# Altium PCB P080514_V11.PcbDoc
Units mm, origin at the board's own origin, x right, y up, seen from the top; angles counter-clockwise.
Board outline 33 x 22 mm, 2 copper layers (Top Layer, Bottom Layer); 22 components, 16 nets, 64 pads, 4 vias.
Unrouted connection lines stored in the file: 1.
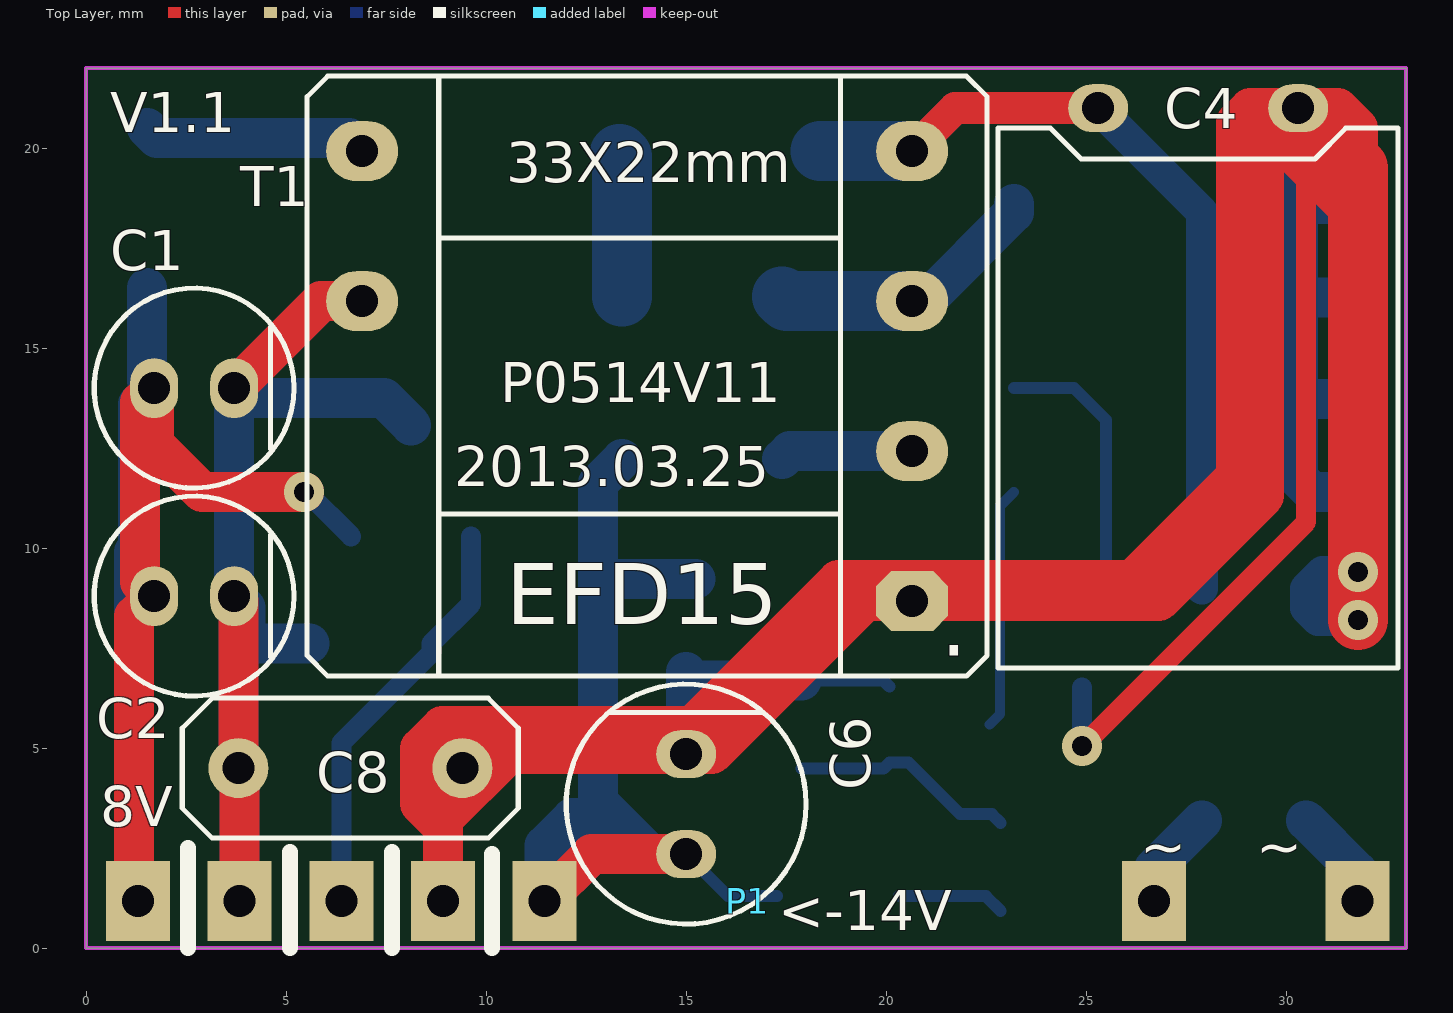
[diagram p0: Top Layer view]
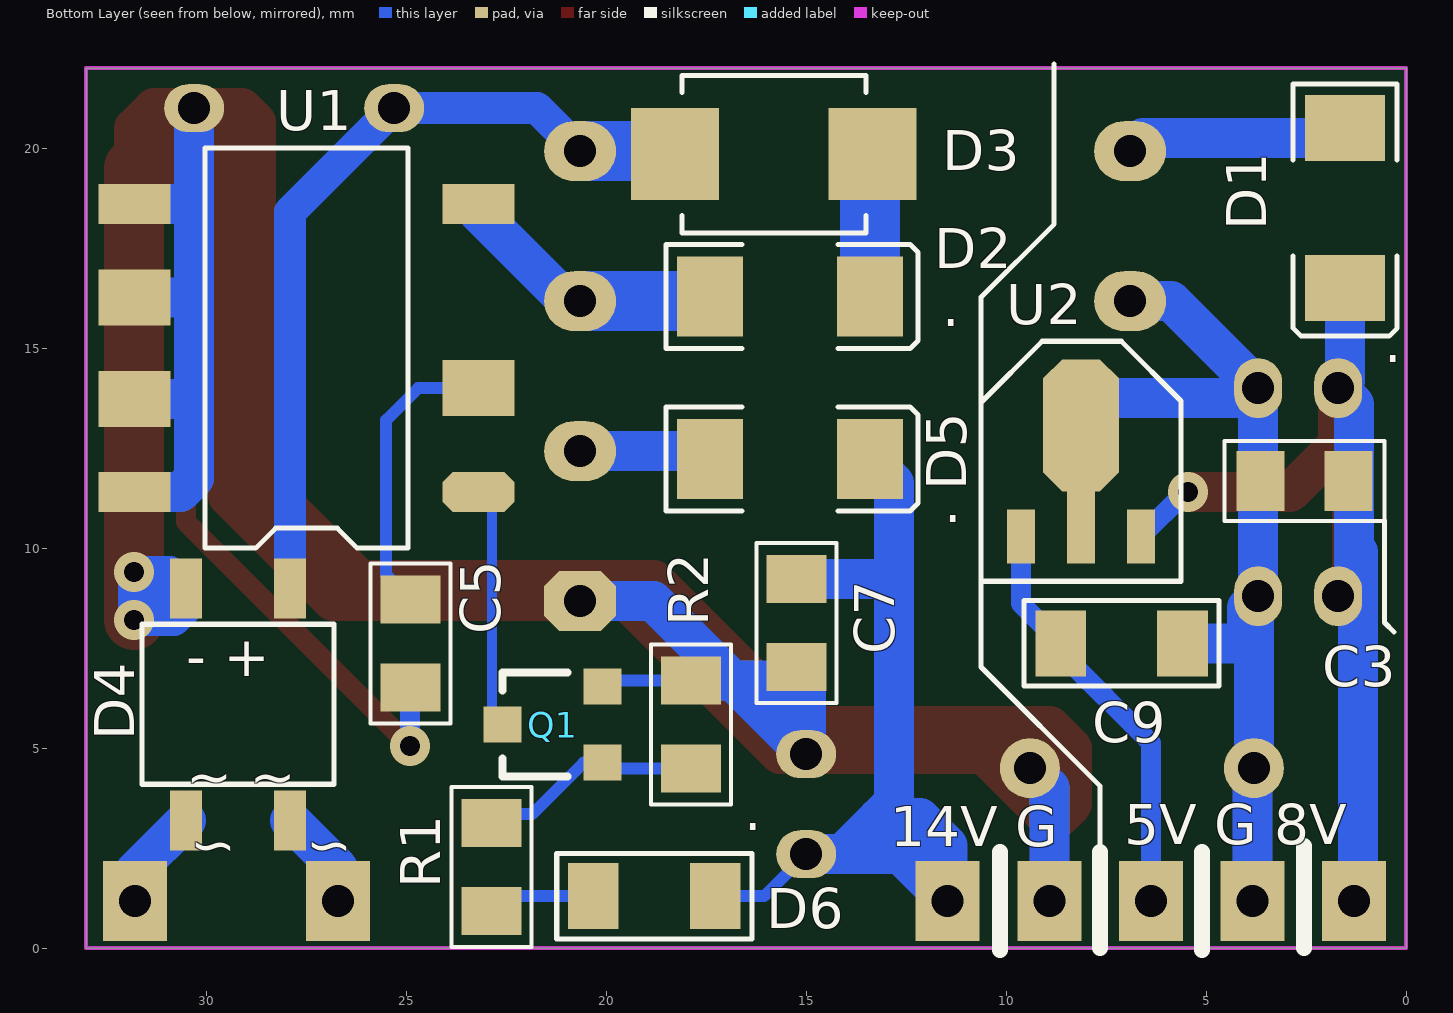
[diagram p1: Bottom Layer view, seen from below]

## Layer stack, top to bottom
Top Layer: signal copper 0.0356
Dielectric: dielectric 0.32, FR-4, Dk 4.8
Bottom Layer: signal copper 0.0356

## Board outline
0,0 33,0 33,22 0,22

## Design rules (kind name [scope] priority, off if disabled: settings)
Clearance [All] p1: gap=0.2
ComponentClearance [All] p1: gap=0 collisioncheckmode=3 verticalgap=0 showdistances=FALSE
Height [All] p1: minheight=0 maxheight=30 prefheight=12.7
HoleSize [All] p1: absolutevalues=TRUE maxlimit=10 minlimit=0.025 maxpercent=80.000 minpercent=20.000
HoleToHoleClearance [All] p1: gap=0.2 allowstackedmicrovias=TRUE
MinimumSolderMaskSliver [All] p1 off: minsoldermaskwidth=0.2
PolygonConnect [All] p1: connectstyle=Relief reliefconductorwidth=0.254 reliefentries=4 polygonreliefangle="90 Angle"
RoutingVias [All] p1: holewidth=0.8 width=1.27 viastyle="Through Hole" minholewidth=0.4 minwidth=0.8 maxholewidth=5 maxwidth=10
SilkToSilkClearance [All] p1 off: silktosilkclearance=0.254
SilkscreenOverComponentPads [All] p1 off: minsilkscreentomaskgap=0.254
SolderMaskExpansion [All] p1: expansion=0.102
TestPointUsage [All] p1: valid=0 allowmultiple=FALSE
Testpoint [All] p1: side=15 testpointundercomponent=TRUE minsize=1.016 maxsize=2.54 preferedsize=1.524 minholesize=0 maxholesize=1.016 preferedholesize=0.813 testpointgrid=0.025 style=1021 order=0123456789
Width [All] p1: maxlimit=10 minlimit=0.254 preferedwidth=0.254
17 further rules are at their usual default settings.

## Components (designator, comment, footprint, x,y, rotation, side; value= is the part's Value field where it differs from the comment)
C1 "Cap Pol1" C-5*7 2.7,14 r0 top
C2 "Cap Pol1" C-5*7 2.7,8.8 r0 top
C3 "Cap" 0805 2.54,11.684 r90 bottom
C4 "Cap Pol1" "C-10 卧式" 27.8,21 r0 top locked
C5 "Cap" 0805 24.892,7.62 r0 bottom
C6 "Cap Pol1" 电解电容6*11mm-脚距2.5mm 15,3.6 r90 top
C7 "Cap" 0805 15.24,8.128 r0 bottom
C8 "Y电容" 07D471K 6.604,4.5 r180 top
C9 "25V" 1206 7.112,7.62 r180 bottom
D1 "US1J" SMA 1.524,18.5 r270 bottom
D2 "US1J" SMA 15.399,16.292 r180 bottom
D3 "P6KE200" SMBJ 15.807,19.848 r180 bottom
D4 "Bridge1" MB10S 29.2,6.096 r180 bottom
D5 "US1J" SMA 15.399,12.228 r180 bottom
D6 "14V" 1206 18.796,1.3 r180 bottom
P1 "Header 13" 2.54引脚 1.3,1.172 r0 top locked
Q1 "" sot-23 21.336,5.588 r90 bottom
R1 "Res1" 0805 22.86,2.032 r0 bottom
R2 "Res1" 0805 17.884,5.588 r0 bottom
T1 "EFD15" EFD15_DIP8 13.775,14.3 r90 top locked
U1 "" TNY275_SMD 27.491,15 r0 bottom
U2 "78L05" SOT89 8.128,11.684 r180 bottom locked

## Footprints (in the part's own frame and the unit in brackets; to place one, negate y for a bottom-side part, rotate by r counter-clockwise, add the part's x,y. Pads: shape width x height; smd on the part's side, far side on the other; paste and mask are expansions set on the pad)
2.54引脚 [mm]
  rect 1.6x2 hole 0.8: 1(0,0) 2(2.54,0) 3(5.08,0) 4(7.62,0) 5(10.16,0) 11(25.4,0) 13(30.48,0)
07D471K [mm]
  round 1.5 hole 0.8: 1(-2.8,0) 2(2.8,0)
  silkscreen extent -4.2,-1.75 4.2,1.75
0805 [mm]
  rect 1.5x1.2 smd: 1(0,1.1) 2(0,-1.1)
  silkscreen extent -1,-2 1,2
1206 [mil]
  rect 50x65 smd: 1(-60,0) 2(60,0)
  silkscreen extent -96,-42 96,42
C-5*7 [mm]
  oval 1.2x1.5 hole 0.8: 1(-1,0) 2(1,0)
  silkscreen extent -2.5,-2.5 2.5,2.5
"C-10 卧式" [mm]
  oval 1.5x1.2 hole 0.8: 1(-2.5,0) 2(2.5,0)
  silkscreen extent -5,-14 5,-0.5
EFD15_DIP8 [mm]
  oct 1.5x1.8 hole 0.8: 1(-5.625,-6.875)
  oval 1.5x1.8 hole 0.8: 2(-1.875,-6.875) 3(1.875,-6.875) 4(5.625,-6.875) 5(5.625,6.875) 6(1.875,6.875)
  silkscreen extent -7.5,-8.75 7.5,8.25
MB10S [mm]
  rect 0.8x1.5 smd: 1(-1.3,-2.9) 2(1.3,-2.9) 3(1.3,2.9) 4(-1.3,2.9)
  silkscreen extent -2.4,-2 2.4,2
SMA [mm]
  rect 1.65x2 smd: 1(-2,0) 2(2,0)
  silkscreen extent -3.1,-1.3 3.2,1.3
SMBJ [mm]
  rect 2.2x2.3 smd: 1(-2.47,0) 2(2.47,0)
  round 0.5 on Bottom Overlay: 3(4.307,1.552)
  silkscreen extent -2.3,-1.97 2.3,1.97
SOT89 [mm] "SOT-89; Body 4.6 x 4.25 mm, inc. leads (LxW max)"
  oct 1.9x3.3 smd: 0(0,1.388)
  rect 0.7x1.35 smd: 1(-1.5,-1.388) 3(1.5,-1.388)
  rect 0.7x1.8 smd: 2(0,-1.162)
  silkscreen extent -2.5,-2.51 2.5,3.49
sot-23 [mm] "SOT-23; 3 Leads; Body 3.0 x 2.6 mm, inc. leads (LxW max)"
  rect 0.9x0.95 smd: 1(-0.95,-1.25) 2(0.95,-1.25) 3(0,1.25)
  silkscreen extent -1.3,-0.38 1.3,1.25
TNY275_SMD [mm]
  oct 1.8x1 smd: 1(-4.3,3.6)
  rect 1.8x1.4 smd: 2(-4.3,1) 6(4.3,-1.27) 7(4.3,1.27)
  rect 1.8x1 smd: 4(-4.3,-3.6) 5(4.3,-3.6) 8(4.3,3.6)
  silkscreen extent -2.54,-5 2.54,5
电解电容6*11mm-脚距2.5mm [mm]
  oval 1.2x1.5 hole 0.8: 1(-1.25,0) 2(1.25,0)
  silkscreen extent -3,-3 3,3

## Part data
C1 C2 C4 C6: "Polarized Capacitor (Radial)"
C3 C5 C7: "Capacitor"
C8: library part Cap, "Capacitor"
C9: library part "Cap Pol1", "Polarized Capacitor (Radial)"
D1 D5: library part "Diode 1N4007", "1 Amp General Purpose Rectifier"
D2 D3: library part Diode, "Default Diode"
D4: "Full Wave Diode Bridge"
D6: library part "D Zener", "Zener Diode"
P1: "Header, 13-Pin"
Q1: library part NPN, "NPN Bipolar Transistor"
R1 R2: "Resistor"
U1: library part TNY275
U2: library part "Volt Reg", "Voltage Regulator"

## Via types
v1: diameter 1, hole 0.5, Top Layer to Bottom Layer, 4 vias

## Nets (pads, with @x,y where several pads share a name; then routed paths per layer and width w, separated by ;. In a path a pad name is that pad's centre, name@x,y a point inside that pad or via, vN(x,y) a via of type N, cw(c..) or ccw(c..) an arc to the next point about the centre after c; other vN are vias at no path point)
5V: C9.1 P1.3 U2.1 | length 10.5
  Bottom Layer w0.5: P1.3 6.38,5.13 8.636,7.386 C9.1 9.628,8.612 U2.1
5V_GND: C1.2 C2.2 C3.1 C8.2 C9.2 P1.2 T1.6 U2.0 U2.2 | length 36.5
  Top Layer w1: C2.2 3.804,8.696 C8.2 3.84,4.464 P1.2 ; C1.2 5.875,16.175 T1.6
  Bottom Layer w1: P1.2 3.84,4.464 C8.2 3.804,8.696 C2.2 ; C9.2 3.984,7.62 3.984,8.516 C2.2 ; T1.6 5.875,16.175 C1.2 ; U2.0 7.449,13.75 3.95,13.75 C1.2 ; C2.2 C1.2
8V: C1.1 C2.1 C3.2 D1.2 P1.1 U2.3 | length 39.5
  Top Layer w1: P1.1 1.2,1.272 1.2,8.3 C2.1 1.35,9.15 1.35,13.65 C1.1 1.7,12.6 2.9,11.4 v1(5.45,11.4)
  Bottom Layer w0.5: v1(5.45,11.4) 5.524,11.4 U2.3
  Bottom Layer w1: 1.2,7.2 1.2,9.9 1.3,10 ; P1.1 1.2,1.272 1.2,8.3 C2.1 1.3,9.2 1.3,10 ; D1.2 1.524,14.176 C1.1 1.3,13.6 1.3,10
14V: C6.1 C7.2 D5.2 D6.2 P1.5 | length 28.2
  Top Layer w1: P1.5 12.638,2.35 C6.1
  Bottom Layer w0.3: C6.1 16.05,1.3 D6.2
  Bottom Layer w1: 12.8,9.2 12.828,9.228 C7.2 ; 13.2,3.25 12.15,3.25 11.46,2.56 P1.5 12.638,2.35 C6.1 14.1,2.35 12.8,3.65 12.8,11.629 D5.2
AC_L: D4.1 P1.13 | length 2.6
  Bottom Layer w1: D4.1 31.78,1.916 P1.13
AC_N: D4.2 P1.11 | length 2.5
  Bottom Layer w1: P1.11 26.7,1.996 D4.2
GND: C4.2 C5.1 C6.2 C7.1 C8.1 D4.4 P1.4 Q1.2 R2.2 T1.1 U1.5 U1.6 U1.7 U1.8 | length 159.6
  Top Layer w0.5: v1(24.9,5.05) 30.5,10.65 30.5,20.25 30.3,20.45 C4.2
  Top Layer w1: 10.55,4.85 8.92,3.22 8.92,2.9 ; 31.8,18.25 30.3,19.75 C4.2 ; 8.92,2.9 8.92,4.016 9.754,4.85 C6.2 15.65,4.85 19.475,8.675 T1.1 26.825,8.675 29.45,11.3 29.45,20.15 C4.2 ; 8.92,2.9 P1.4 8.92,3.03 8.35,3.6 8.35,5 8.9,5.55 15.15,5.55 18.8,9.2 26.15,9.2 28.75,11.8 28.75,20.65 29.1,21 C4.2 ; C4.2 31.3,21 31.8,20.5 31.8,19.5 C4.2
  Top Layer w1.5: v1(31.8,8.2) 31.8,19.5
  Bottom Layer w0.3: C6.2 16.838,6.688 19.936,6.688 Q1.2
  Bottom Layer w0.5: C5.1 24.9,6.512 v1(24.9,5.05)
  Bottom Layer w0.8: D4.4@30.85,8.65 31.05,8.65 v1(31.8,9.4) ; v1(31.8,9.4) v1(31.8,8.2) 30.8,8.2 30.5,8.5 D4.4 30.904,9.4 v1(31.8,9.4)
  Bottom Layer w1: P1.4 8.92,4.016 C8.1 ; 15,6.25 15.438,6.688 R2.2 ; C7.1@15,6.9 C6.2 18.825,8.675 T1.1 ; 30.3,13.6 30.43,13.73 U1.7 U1.7@31.671,13.85 ; 30.3,16.25 30.32,16.27 U1.6 U1.6@31.711,16.35 ; 30.3,18.65 30.35,18.6 U1.5 ; C4.2 30.3,11.75 30.65,11.4 U1.8
NetC4_1: C4.1 D3.1 D4.3 T1.4 | length 25.7
  Top Layer w0.8: T1.4 21.725,21 C4.1
  Bottom Layer w0.8: T1.4 21.725,21 C4.1 27.9,18.4 D4.3
  Bottom Layer w1: D3.1 D3.1@18.354,19.925
  Bottom Layer w1.5: D3.1@18.354,19.925 T1.4
NetC5_2: C5.2 U1.2 | length 7.4
  Bottom Layer w0.3: U1.2 24.7,14 25.5,13.2 25.5,9.328 C5.2
NetD1_1: D1.1 T1.5 | length 5.6
  Bottom Layer w1: D1.1 1.774,20.25 6.575,20.25 T1.5
NetD2_1: D2.1 T1.3 U1.4 | length 7
  Bottom Layer w1: T1.3 20.975,16.175 23.192,18.391 U1.4
  Bottom Layer w1.5: D2.1 17.516,16.175 T1.3
NetD2_2: D2.2 D3.2 | length 3.6
  Bottom Layer w1.5: D3.2 13.399,19.786 D2.2
NetD5_1: D5.1 T1.2 | length 3.3
  Bottom Layer w1: D5.1 17.596,12.425 T1.2
NetD6_1: D6.1 R1.1 | length 2.7
  Bottom Layer w0.3: D6.1 22.492,1.3 R1.1
NetQ1_1: Q1.1 R1.2 R2.1 | length 5.7
  Bottom Layer w0.3: R2.1 19.936,4.488 Q1.1 20.562,4.638 21.85,3.35 22.642,3.35 R1.2
NetQ1_3: Q1.3 U1.1 | length 6.1
  Bottom Layer w0.254: Q1.3 22.85,5.852 22.85,11.058 U1.1
pads on no net: D3.3

## Keep-outs
Keep-Out Layer:
  the board outline again, w0.1

## Silkscreen, mask and mechanical layers (free items; w line width, h text height)
Top Overlay:
  lines w0.4: 2.55,0 2.55,2.5 ; 5.1,0 5.1,2.4 ; 7.65,0 7.65,2.4 ; 10.15,0 10.15,2.35
  text "V1.1" at 0.6,20.4 h1
  text "33X22mm" at 10.5,19.15 h1
  text "P0514V11" at 10.35,13.65 h1
  text "2013.03.25" at 9.2,11.55 h1
  text "8V" at 0.35,3.05 h1
  text "~    ~" at 26.35,2.05 h1
  text "<-14V" at 17.3,0.45 h1
Bottom Overlay:
  lines w0.127: 0.3,7.9 0.54,8.14 0.54,10.684 ; 7.65,2.4 7.65,4.05 10.628,7.028 10.628,9.172 ; 8.8,22.1 8.8,18.1 10.628,16.272 10.628,13.643
  lines w0.4: 2.55,0 2.55,2.55 ; 5.1,-0.05 5.1,2.4 ; 7.65,0 7.65,2.4 ; 10.15,-0.05 10.15,2.4
  text "." at 11.6,15.55 h1
  text "." at 0.55,14.65 h1
  text "." at 11.55,10.65 h1
  text "." at 16.55,2.95 h1
  text "5V G 8V" at 7.05,2.6 h1
  text "14V G" at 12.9,2.55 h1
  text "~    ~" at 26.35,2.1 h1

## Text inside footprints (layer, text, board x,y; h text height)
D4: Bottom Overlay "~ ~" at 30.5,3.796 h1; Bottom Overlay "- +" at 30.5,6.796 h1